# EAGLE board ELE-T304 (EAGLE 4.11)
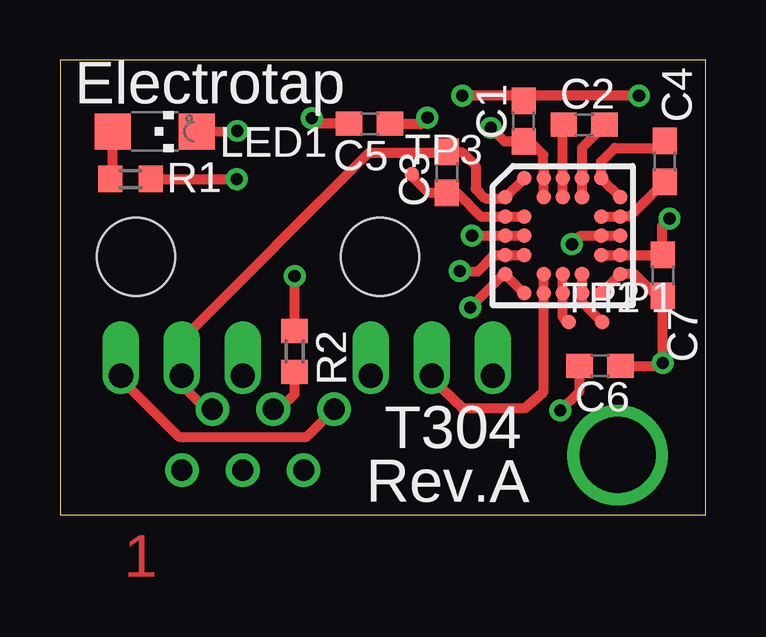
[diagram p0: board, top side]
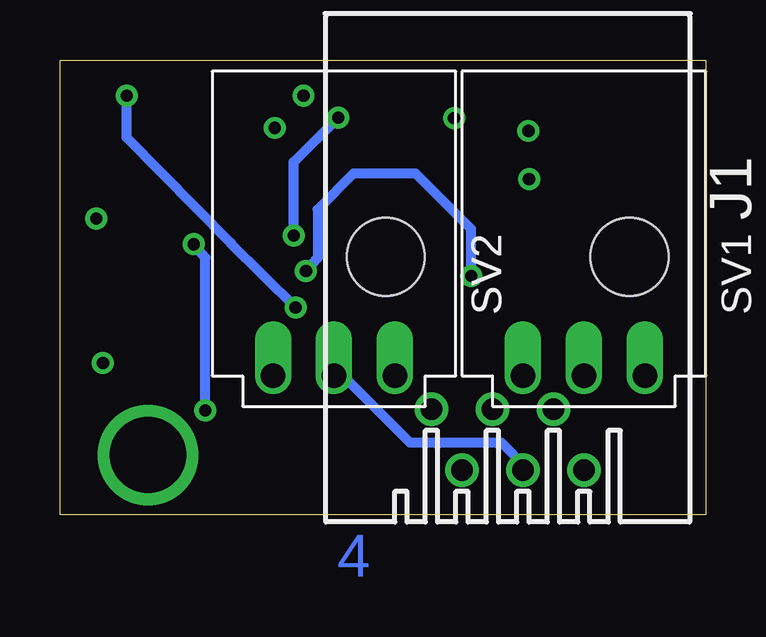
[diagram p1: board, bottom side, seen from below]

Size 26.9 x 18.97 mm. Coordinates in mm from the lower left corner, seen from the top.
Outline: 0,0 26.9,0 26.9,18.97 0,18.97 0,0
Copper layers (1*16): Top 0.035mm / dielectric 1.5mm / Bottom 0.035mm
Design rules "default": minimum track width 10mil, minimum drill 20mil, track to track 8mil, track to pad 8mil, pad to pad 7mil, via to via 8mil, smd to smd 7mil, copper to edge 40mil, drill to drill 8mil, minimum pad ring 10mil, minimum via ring 8mil, stop-mask expansion 4mil, vias tented up to drill 0mil, thermal gap 10mil

## Footprints (pad centres in the part's own frame; a part is rotated, then mirrored left to right if it is on the bottom)
C0603 = smd 1.1 x 1: 1 -0.85,0; 2 0.85,0
TELEPHONE_JACK = drill 0.889 round: 1 -3.175,8.89; 2 -1.905,6.35; 3 -0.635,8.89; 4 0.635,6.35; 5 1.905,8.89; 6 3.175,6.35 | hole 3.251: -5.08,0; 5.08,0
CHIPLED_1206 = smd 1.5 x 1.5: A 0,-1.75; C 0,1.75
R0603 = smd 1 x 1.1: 1 -0.85,0; 2 0.85,0
JACK_MOLEX_3PIN_RA = drill 1.016 offset: 5V 0,0; GND 0,5.08; SENSOR 0,2.54
TP06R = smd 0.6 x 0.6: TP 0,0
CSPBGA-32 = smd 0.6 x 0.6: A2 -1.6,2.4; A3 -0.8,2.4; A4 0,2.4; A5 0.8,2.4; A6 1.6,2.4; B1 -2.4,1.6; B3 -0.8,1.6; B4 0,1.6; B5 0.8,1.6; B7 2.4,1.6; C1 -2.4,0.8; C2 -1.6,0.8; C6 1.6,0.8; C7 2.4,0.8; D1 -2.4,0; D2 -1.6,0; D6 1.6,0; D7 2.4,0; E1 -2.4,-0.8; E2 -1.6,-0.8; E6 1.6,-0.8; E7 2.4,-0.8; F1 -2.4,-1.6; F3 -0.8,-1.6; F4 0,-1.6; F5 0.8,-1.6; F7 2.4,-1.6; G2 -1.6,-2.4; G3 -0.8,-2.4; G4 0,-2.4; G5 0.8,-2.4; G6 1.6,-2.4

## Placement (x,y rotation side)
C1  0.1uF  [C0603]  19.32,16.42 90 top
C2  0.022uF  [C0603]  21.84,16.27 180 top
C3  0.022uF  [C0603]  16.12,14.29 90 top
C4  0.022uF  [C0603]  25.19,14.74 270 top
C5  0.1uF  [C0603]  12.9,16.32 180 top
C6  0.047uF  [C0603]  22.5,6.21 0 top
C7  0.1uF  [C0603]  25.12,9.99 270 top
J1  [TELEPHONE_JACK]  8.25,10.76 180 bottom
LED1  [CHIPLED_1206]  3.96,15.99 270 top
R1  1K  [R0603]  2.94,14.01 0 top
R2  np (0 ohms for ref)  [R0603]  9.77,6.82 270 top
SV1  JACK_MOLEX_3PINRA_MALE  [JACK_MOLEX_3PIN_RA]  2.53,5.8 90 bottom
SV2  JACK_MOLEX_3PINRA_MALE  [JACK_MOLEX_3PIN_RA]  12.95,5.8 90 bottom
TP1  PTR1TP06R  [TP06R]  22.6,8.04 0 top
TP2  PTR1TP06R  [TP06R]  21.2,8.04 0 top
TP3  PTR1TP06R  [TP06R]  14.65,14.21 0 top
U1  ADXRS150  [CSPBGA-32]  20.95,11.65 0 top

## Library data of the parts
C1-C7 J1 SV1 SV2 U1 = TEABOX-LIB
LED1 = led
R1 R2 = rcl
TP1-TP3 = testpad

## Nets
+5V: C1.1 C7.1 J1.6 R1.2 SV1.5V SV2.5V U1.A3 U1.B3 U1.E6 U1.E7
GND: C1.2 C5.2 C6.2 C7.2 J1.1 LED1.C SV1.GND SV2.GND U1.F1 U1.F7 U1.G2 U1.G6
N$1: C2.1 U1.A5 U1.B5
N$2: C2.2 U1.A4 U1.B4
N$3: C4.2 U1.C6 U1.C7
N$4: C4.1 U1.A6 U1.B7
N$5: J1.4 R2.2
N$6: J1.3 SV2.SENSOR U1.F3 U1.G3
N$7: LED1.A R1.1
N$8: TP1.TP U1.F5 U1.G5
N$9: C3.2 J1.2 SV1.SENSOR U1.A2 U1.B1
N$10: R2.1 U1.E1 U1.E2
N$11: C6.1 U1.D6 U1.D7
N$12: C3.1 TP3.TP U1.C1 U1.C2
N$16: C5.1 U1.D1 U1.D2
N$18: TP2.TP U1.F4 U1.G4

## Tracks (layer width: path | path; a pad name or v marks a point on that pad's centre or on a via)
+5V  (via drill 0.51)
  Top 0.406: SV1.5V 2.53,5.68 4.95,3.26 10.28,3.26 J1.6 | 20.14,14.57 20.15,14.55 U1.B3 | U1.A3 20.15,14.58 20.14,14.57 | 25.13,10.85 25.15,10.84 C7.1 25.09,11.04 25.09,12.05 v25.39,12.36 | 25.13,10.85 U1.E7 23.32,10.85 23.31,10.83 23.3,10.85 U1.E6 | 25.13,10.85 25.12,10.88 | 7.36,14.24 7.39,14.26 | 7.36,14.24 v7.36,14.01 | R1.2 7.34,14.01 7.36,14.24 | v17.95,16.14 18.52,15.57 C1.1 19.59,15.57 20.14,15.02 20.14,14.57
GND  (via drill 0.51)
  Top 0.406: v16.76,17.49 19.04,17.49 19.27,17.26 C1.2 19.11,17.47 v24.12,17.49 | C5.2 10.71,16.32 v10.48,16.55 | v7.39,16.02 7.39,16.19 7.34,16.02 LED1.C | 25.12,6.36 C7.2 24.85,9.14 23.95,10.05 23.39,10.05 | v17.09,8.65 18.49,10.05 U1.F1 U1.G2 | U1.G2 | U1.G2 | 25.12,6.36 v25.12,6.34 | C6.2 24.96,6.21 25.12,6.36 | U1.G6 22.55,9.26 23.34,10.05 U1.F7 23.39,10.05 | 23.39,10.05
  Bottom 0.406: v24.12,17.49 24.12,15.73 19.78,11.34 19.78,11.32 v17.09,8.65
N$1
  Top 0.406: 21.76,14.52 | U1.B5 21.76,14.52 | 21.76,14.52 21.75,14.53 U1.A5 21.75,15.32 22.69,16.25 C2.1
N$2
  Top 0.406: U1.B4 U1.A4 20.95,16.27 20.98,16.29 C2.2
N$3
  Top 0.406: C4.2 23.76,12.46 23.34,12.46 U1.C7 23.34,12.43 22.54,12.43 | 22.54,12.43 22.52,12.43 | U1.C6 22.54,12.43
N$4
  Top 0.406: U1.A6 U1.B7 | U1.A6 | C4.1 24.9,15.3 23.11,15.3 22.55,14.74 22.55,14.08 | 22.55,14.08 | U1.A6 22.55,14.08
N$5
  Top 0.406: J1.4 9.01,4.28 9.77,5.04 R2.2
N$6
  Top 0.406: U1.G3 | U1.G3 U1.F3 | U1.G3 20.14,9.23 | U1.G3 20.15,5.13 19.38,4.46 16.76,4.46 15.46,5.7 15.46,5.8 SV2.SENSOR
  Bottom 0.406: SV2.SENSOR 15.11,5.8 12.31,3.01 8.5,3.01 7.49,1.99 J1.3
N$7
  Top 0.406: R1.1 2.09,14.25 2.21,14.37 LED1.A
N$8
  Top 0.406: U1.G5 | U1.G5 U1.F5 | U1.G5 21.74,9.23 | TP1.TP 22.58,8.04 21.75,8.87 U1.G5
N$9
  Top 0.406: J1.2 6.22,4.28 5.08,5.42 SV1.SENSOR | U1.A2 U1.B1 18.55,13.21 18.54,13.2 17.72,13.2 17.32,13.6 17.32,14.57 16.76,15.13 16.15,15.13 | SV1.SENSOR 5.08,7.3 12.87,15.1 16.12,15.1 16.15,15.13 | SV1.SENSOR 5.05,5.78 | U1.A2 19.35,14.08 | U1.A2 | 16.15,15.13 C3.2
N$10  (via drill 0.51)
  Top 0.406: R2.1 9.77,7.63 | U1.E1 U1.E2 | U1.E1 18.52,10.85 18.51,10.83 | U1.E1 18.07,10.85 17.41,10.16 16.96,10.17 v16.66,10.17 | R2.1 9.77,7.61 | R2.1 v9.77,9.97
  Bottom 0.406: v16.66,10.17 16.18,10.71 16.18,12.74 14.68,14.24 12.08,14.24 9.77,11.92 v9.77,9.97
N$11  (via drill 0.51)
  Top 0.406: U1.D7 U1.D6 21.69,11.65 v21.33,11.29 | C6.1 21.65,5.16 v20.85,4.36
  Bottom 0.406: v20.85,4.36 20.85,10.73 v21.33,11.29
N$12
  Top 0.406: U1.C1 18.57,12.45 U1.C2 | U1.C1 | U1.C1 17.53,12.45 16.54,13.44 C3.1 15.35,13.44 14.62,14.16 14.65,14.19 TP3.TP
N$14  (via drill 3.17)
  other vias: 23.24,2.5
N$16  (via drill 0.51)
  Top 0.406: v17.16,11.65 18.54,11.65 | C5.1 13.76,16.57 13.81,16.29 15.03,16.29 v15.31,16.57 | 18.54,11.65 U1.D1 | 18.54,11.65 U1.D2
  Bottom 0.406: v17.16,11.65 17.16,14.72 v15.31,16.57
N$18
  Top 0.406: U1.F4 U1.G4 20.95,8.24 21.15,8.04 TP2.TP

## Text on the board
Top: 1
$GND: 2
$+5V: 3
Bottom: 4
tPlace: Electrotap | T304 | Rev.A
_tplace: C4 | C2 | Electrotap | C5 | C1 | LED1 | R1 | C3 | C7 | R2 | C6 | T304 | Rev.A
_bplace: SV2